# Altium PCB FLYBACK_SWITCHING_POWER_SUPPLY_V1_0.PcbDoc
Units mil, origin at the board's own origin, x right, y up, seen from the top; angles counter-clockwise.
Board outline 2825 x 1550 mil, 2 copper layers (Top Layer, Bottom Layer); 32 components, 21 nets, 77 pads, 0 vias.
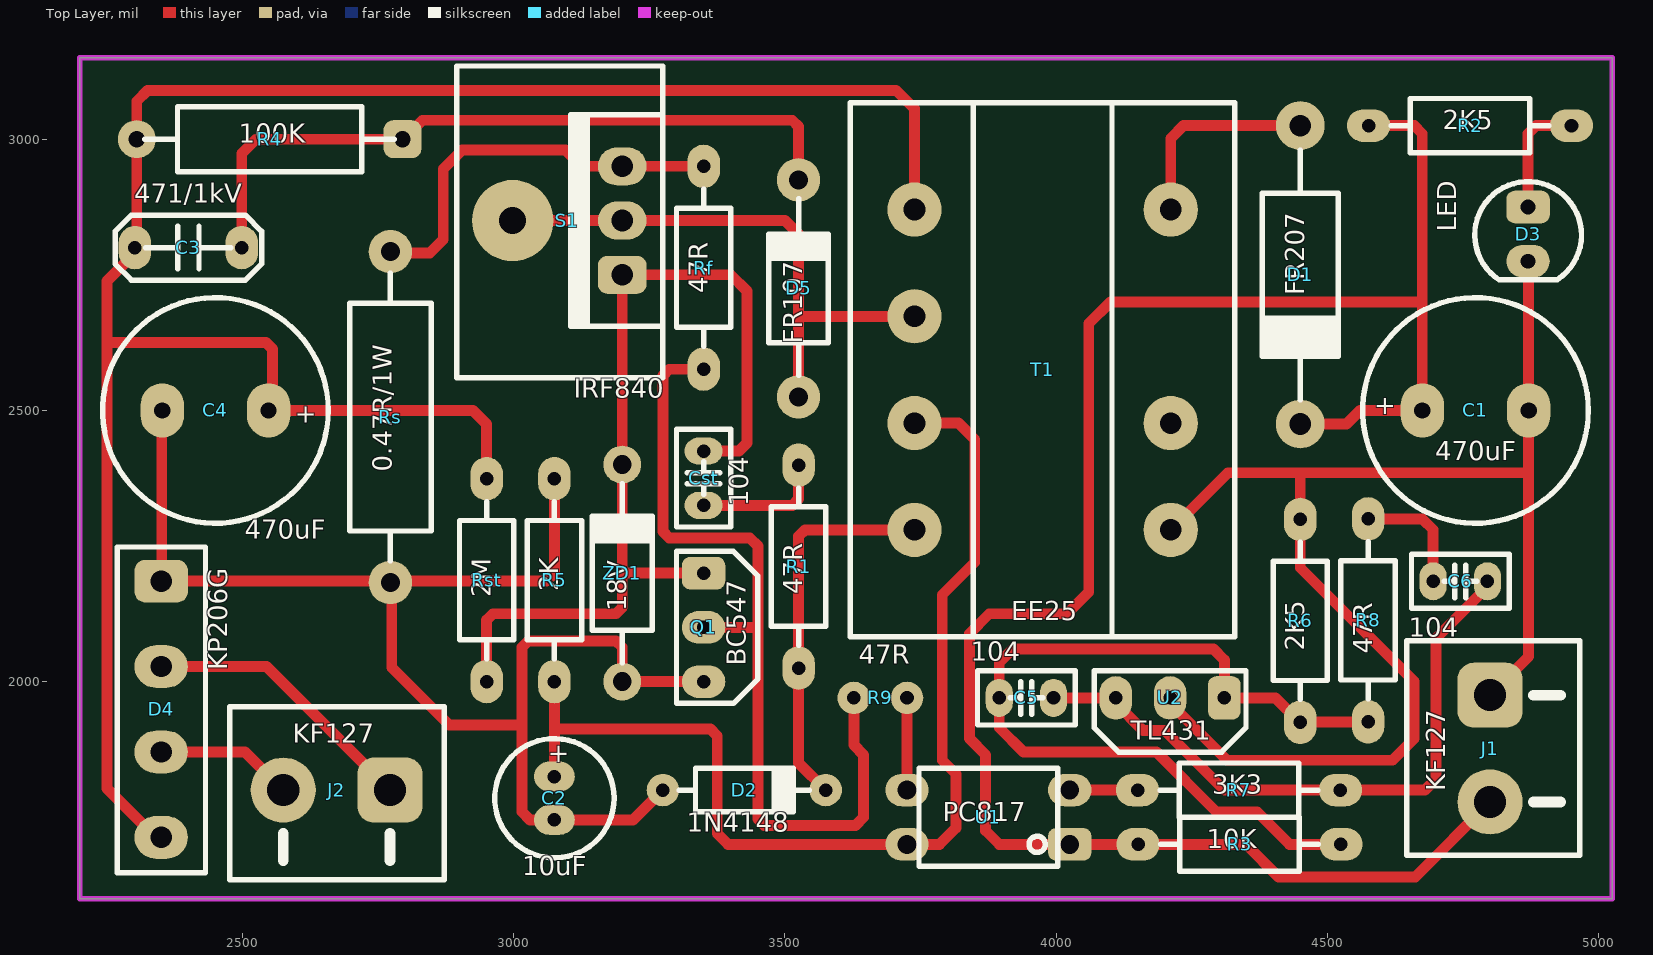
[diagram p0: Top Layer view]
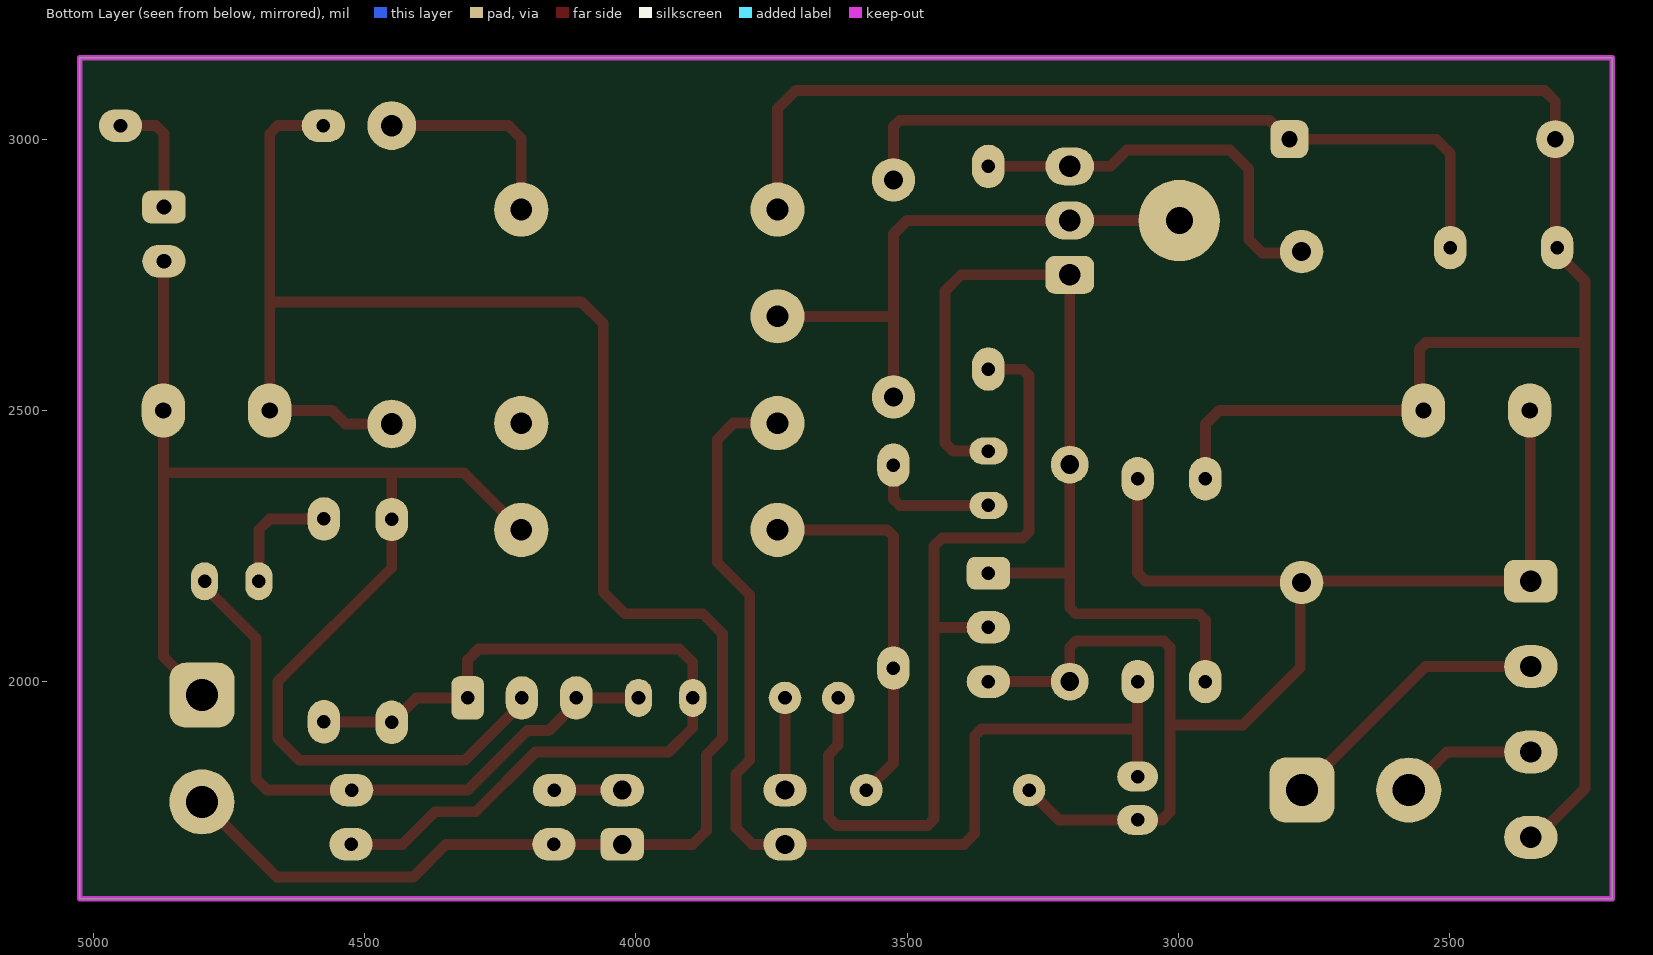
[diagram p1: Bottom Layer view, seen from below]
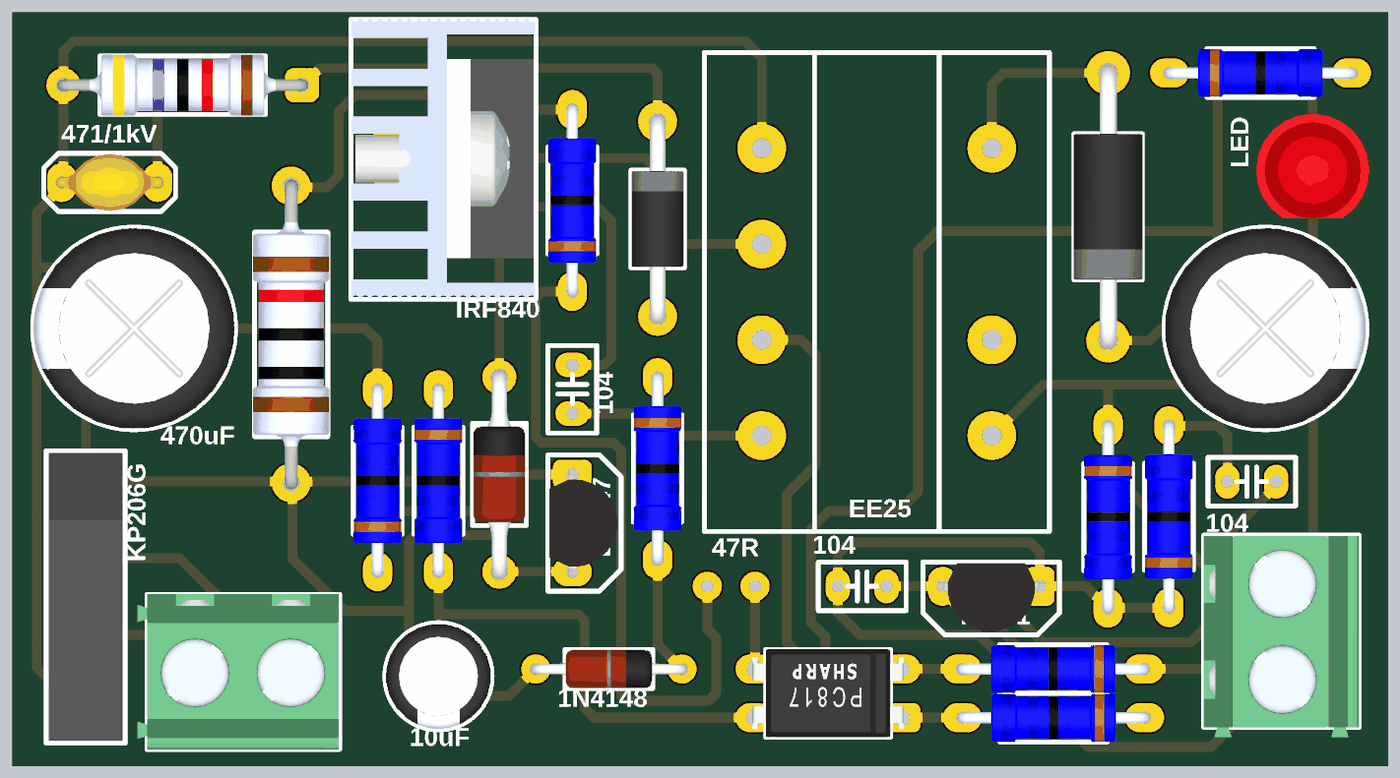
[diagram p2: 3D render of the assembled board from above, using the file's embedded part models]

## Layer stack, top to bottom
Top Solder: solder mask 0.4, Solder Resist, Dk 3.5
Top Layer: signal copper 1.4
Dielectric 1: dielectric 12.6, FR-4, Dk 4.8
Bottom Layer: signal copper 1.4
Bottom Solder: solder mask 0.4, Solder Resist, Dk 3.5

## Board outline
2200,1600 5025,1600 5025,3150 2200,3150

## Design rules (kind name [scope] priority, off if disabled: settings)
Clearance [All] p1: gap=10 ignorepadtopadclearanceinfootprint=FALSE except(0: Arc-Hole Track-Hole SMDPad-Hole THPad-Hole Via-Hole Fill-Hole Poly-Hole Region-Hole Text-Hole)
PolygonConnect [All] p1: connectstyle=Relief reliefconductorwidth=10 reliefentries=4 polygonreliefangle="90 Angle" airgapwidth=10
RoutingVias [All] p1: holewidth=28 width=50 viastyle="Through Hole" minholewidth=28 minwidth=50 maxholewidth=28 maxwidth=50
SolderMaskExpansion [All] p1: expansion=4 istentingtop=FALSE
Width [All] p1: maxlimit=50 minlimit=10 preferedwidth=20
30 further rules are at their usual default settings.

## Components (designator, comment, footprint, x,y, rotation, side; value= is the part's Value field where it differs from the comment)
C1 "470uF" CAP_RAD_D10x12.5 4773,2500 r0 top
C2 "10uF" CAP_RAD_D05x11 3075,1785 r270 top
C3 "471/1kV" CAP_Ceramic_5MM 2400,2800 r180 top
C4 "470uF" CAP_RAD_D10x12.5 2450,2500 r180 top
C5 "104" CAP_Ceramic_2.5MM 3945,1970 r0 top
C6 "104" CAP_Ceramic_2.5MM 4745,2185 r0 top
Cst "104" CAP_Ceramic_2.5MM 3350,2375 r270 top
D1 "FR207" DO-204AC-BK 4450,2750 r270 top
D2 "1N4148" DO-204AH-RD 3425,1800 r0 top
D3 "LED" LED_5MM 4870,2825 r270 top
D4 "KP206G" DIODE_2A 2350,1950 r270 top
D5 "FR107" DO-204AL-BK 3525,2725 r90 top
J1 "KF127" DG127-5.0-02P-14-00AH 4800,1975 r270 top
J2 "KF127" DG127-5.0-02P-14-00AH 2771.85,1800 r180 top
Q1 "BC547" TO-92 3350,2100 r270 top
R1 "47R" RES-0.25W-H 3525,2212 r270 top
R2 "2K5" RES-0.25W-H 4763,3025 r0 top
R3 "10K" RES-0.25W-H 4338,1700 r180 top
R4 "100K" RES-0.5W-H 2550,3000 r180 top
R5 "2K" RES-0.25W-H 3075,2187 r270 top
R6 "2K5" RES-0.25W-H 4450,2112 r270 top
R7 "3K3" RES-0.25W-H 4337,1800 r180 top
R8 "47R" RES-0.25W-H 4575,2113 r90 top
R9 "47R" RES-0.25W-V 3725,1970 r180 top
Rf "47R" RES-0.25W-H 3350,2763 r90 top
Rs "0.47R/1W" RES-1W-H 2772.5,2487.72 r90 top
Rst "2M" RES-0.25W-H 2950,2187 r90 top
S1 "IRF840" TO-220-HEAT-SINK-1 3200,2850 r90 top
T1 "EE25" TRANSFORMER-FLUOLAMP-8W 3975,2575 r270 top
U1 "PC817" PC817-DIP 3875,1750 r180 top
U2 "TL431" TO-92 4210,1970 r180 top
ZD1 "18V" DO-204AL-RD 3200,2200 r90 top

## Footprints (in the part's own frame and the unit in brackets; to place one, negate y for a bottom-side part, rotate by r counter-clockwise, add the part's x,y. Pads: shape width x height; smd on the part's side, far side on the other; paste and mask are expansions set on the pad)
CAP_Ceramic_2.5MM [mil]
  oval 50x70 hole 25: 1(-50,0) 2(50,0)
  silkscreen extent -90,-50 90,50, body extent -92,-49 92,49, height 289
CAP_Ceramic_5MM [mil]
  oval 60x80 hole 25: 1(-98.43,0) 2(98.43,0)
  silkscreen extent -135,-60 135,60, body extent -110,-59 110,59, height 216
CAP_RAD_D05x11 [mil]
  oval 55x75 hole 25: 1(-40,0) 2(40,0)
  silkscreen extent -110,-110 110,110, body extent -108,-108 108,108, height 492
CAP_RAD_D10x12.5 [mil]
  oval 80x100 hole 30: 1(-98,0) 2(98,0)
  silkscreen extent -208,-208 208,208, body extent -207,-207 207,207, height 551
DG127-5.0-02P-14-00AH [mil]
  rrect50% 120x120 hole 59.06: 1(0,0)
  round 120 hole 59.06: 2(196.85,0)
  silkscreen extent -100,-154 295,165, body extent -98,-154 315,165, height 398
DIODE_2A [mm]
  rrect50% 2x2.5 hole 1: 1(-5.975,0)
  oval 2x2.5 hole 1: 2(-1.975,0) 3(2.025,0) 4(6.025,0)
  silkscreen extent -7.57,-2.05 7.68,2.07, body extent -7.47,-1.9 7.53,1.9, height 11
DO-204AC-BK [mil]
  round 90 hole 40: 1(-275,0) 2(275,0)
  silkscreen extent -230,-70 230,70, body extent -293,-71 293,71, height 146
DO-204AH-RD [mil]
  round 60 hole 25: 1(-150,0) 2(150,0)
  silkscreen extent -120,-40 120,40, body extent -161,-39 161,39, height 82
DO-204AL-BK [mil]
  round 80 hole 35: 1(-200,0) 2(200,0)
  silkscreen extent -160,-55 165,55, body extent -216,-53 216,53, height 110
DO-204AL-RD [mil]
  round 70 hole 35: 1(-200,0) 2(200,0)
  silkscreen extent -165,-55 165,55, body extent -216,-53 216,53, height 110
LED_5MM [mil]
  rrect50% 60x80 hole 27.56: 1(-50,0)
  oval 60x80 hole 27.56: 2(50,0)
  silkscreen extent -97,-98 84,98, body extent -116,-116 98,116, height 339
PC817-DIP [mil]
  rrect50% 80x60 hole 35: 1(-150,50)
  oval 80x60 hole 35: 2(-150,-50) 3(150,-50) 4(150,50)
  silkscreen extent -128,-90 128,90, body extent -155,-90 155,90, height 169
RES-0.5W-H [mil]
  rrect50% 70x70 hole 30: 1(-245,0)
  round 70 hole 30: 2(245,0)
  silkscreen extent -230,-60 230,60, body extent -258,-63 258,63, height 143
RES-0.25W-H [mil]
  oval 80x60 hole 25: 1(-187,0) 2(187,0)
  silkscreen extent -145,-50 145,50, body extent -199,-49 199,49, height 109
RES-0.25W-V [mil]
  round 60 hole 25: 1(0,0) 2(98,0)
  body extent -49,-49 110,49, height 334
RES-1W-H [mil]
  round 80 hole 35: 1(-305,0) 2(305,0)
  silkscreen extent -265,-75 265,75, body extent -319,-79 319,79, height 179
TO-92 [mil]
  rrect50% 60x80 hole 25: 1(-100,0)
  oval 60x80 hole 25: 2(0,0) 3(100,0)
  silkscreen extent -140,-50 140,100, body extent -109,-48 109,93, height 298
TO-220-HEAT-SINK-1 [mil]
  rrect50% 70x90 hole 40: 1(-100,0)
  round 150 hole 50: 2(0,202)
  oval 70x90 hole 40: 2(0,0) 3(100,0)
  silkscreen extent -290,-75 285,305, body extent -288,-74 286,304, height 791
TRANSFORMER-FLUOLAMP-8W [mm]
  round 2.54 hole 1.016: 1(-7.5,-6) 2(-2.5,-6) 3(2.5,-6) 4(7.5,-6) 5(7.5,6) 6(2.5,6) 7(-7.5,6)
  silkscreen extent -12.5,-9 12.5,9

## Part data
C1 C2 C4: library part Capacitor(Radian)
C3 C5 C6 Cst: library part Capacitors(Disc)
D1: library part Diode-FR207
D2: library part Diode-1N4148
D3: library part "LED 5MM"
D4: library part Diode_KP206G
D5: library part Diode-FR107, "1A 1000V"
J1 J2: library part DG127-5.0-02P-14-00AH
Q1: library part Transistor-BC547, "VCEO: 45 Vdc / VCBO: 50 Vdc / VEBO: 6.0 Vdc"
R1 R2 R3 R4 R5 R6 R7 R8 R9 Rf Rs Rst: library part "Resistors THD"
S1: library part Mosfet-IRF840
T1: library part TRANS-FLUOLAMP-V0
U1: library part Opto-PC817
U2: library part Ic-TL431
ZD1: library part Diode-Zener

## Nets (pads, with @x,y where several pads share a name; then routed paths per layer and width w, separated by ;. In a path a pad name is that pad's centre, name@x,y a point inside that pad or via, vN(x,y) a via of type N, cw(c..) or ccw(c..) an arc to the next point about the centre after c; other vN are vias at no path point)
GND: C2.2 C4.2 D2.1 D4.1 Q1.3 R5.1 Rs.1 ZD1.1 | length 2666.2
  Top Layer w20: C4.2 2351,2499 2351,2186.22 D4.1 Rs.1@2770,2185.22 ; R5.1 3075,2200 3060.22,2185.22 Rs.1@2770,2185.22 ; D2.1 3220,1745 C2.2 3030,1745 3015,1760 3015,1920 ; Q1.3 ZD1.1 3200,2063.28 3188.28,2075 3026.72,2075 3015,2063.28 3015,1920 ; Rs.1@2770,2185.22 2775,2180.22 2775,2133 2775,2026 2881,1920 3015,1920
NetC1_1: C1.1 D1.2 J1.2 R2.1 R3.2 U1.1 | length 3627.1
  Top Layer w20: D1.2 4535,2475 4560,2500 C1.1 4675,2700 ; R2.1 4660,3025 4675,3010 4675,2700 ; J1.2 4661.85,1640 4410,1640 4350,1700 R3.2 U1.1 3895,1700 3870,1725 3870,1865 3840,1895 3840,2088.28 3876.72,2125 4020,2125 4060,2165 4060,2660 4100,2700 4675,2700
NetC1_2: C1.2 D3.2 J1.1 R6.1 T1.5 U2.2 | length 2629.3
  Top Layer w20: U2.2 4210,1960 4315,1855 4620,1855 4660,1895 4660,2000 4450,2210 R6.1 4450,2385 ; T1.5 4316.5,2385 4450,2385 ; J1.1 4871,2046 C1.2 4870.5,2500.5 4870.5,2774.5 D3.2 ; 4870,2385 4450,2385
NetC2_1: C2.1 R5.2 T1.3 U1.4 | length 1996.3
  Top Layer w20: C2.1 3075,1912.5 ; R5.2 3075,1912.5 ; T1.3 3820,2476.57 3850,2446.57 3850,2220 3790,2160 3790,1855 3815,1830 3815,1730 3785,1700 U1.4 3395,1700 3375,1720 3375,1900 3362.5,1912.5 3075,1912.5
NetC3_1: C3.1 D5.2 R4.1 | length 1328.6
  Top Layer w20: C3.1 2498.43,2973.43 2525,3000 2796.72,3000 2831.72,3035 3513.28,3035 3525,3023.28 D5.2
NetC3_2: C3.2 C4.1 D4.4 R4.2 Rst.2 T1.1 | length 4010.7
  Top Layer w20: D4.4 2340.16,1712.78 2250,1802.94 2250,2620 ; Rst.2 2950,2475 2925,2500 C4.1 2555,2507 2555,2613.28 2543.28,2625 2255,2625 2250,2620 ; T1.1 3738.78,3056.22 3705,3090 2325,3090 2305,3070 2305,2803.42 C3.2 2301.57,2790 2250,2738.42 2250,2620
NetC5_1: C5.1 R3.1 R6.2 R8.1 U2.1 | length 1626.7
  Top Layer w20: R3.1 4430,1700 4370,1760 4295,1760 4185,1870 3940,1870 3895,1915 C5.1 3895,2035 3920,2060 4290,2060 4310,2040 U2.1 4404.18,1970 4449.18,1925 R6.2 4450.5,1925.5 4574.5,1925.5 R8.1
NetC5_2: C5.2 C6.2 R7.1 U2.3 | length 1193.9
  Top Layer w20: C5.2 U2.3 4110,1960 4160,1910 4200,1910 4310,1800 R7.1 4680,1800 4700,1820 4700,2080 4795,2175 C6.2
NetC6_1: C6.1 R8.2 | length 223.3
  Top Layer w20: R8.2 4675,2300 4695,2280 C6.1
NetCst_1: Cst.1 Q1.1 Rst.1 S1.1 ZD1.2 | length 1744.9
  Top Layer w20: Rst.1 2950,2113.28 2961.72,2125 3188.28,2125 3200,2136.72 3200,2200 ; Q1.1 3200,2200 ; Cst.1 3415,2425 3430,2440 3430,2720 3400,2750 S1.1 ZD1.2 3200,2200
NetCst_2: Cst.2 R1.1 | length 242.1
  Top Layer w20: Cst.2 3513.28,2325 3525,2336.72 R1.1
NetD1_1: D1.1 T1.7 | length 379.6
  Top Layer w20: T1.7 4211.22,3001.22 4235,3025 D1.1
NetD2_2: D2.2 R1.2 T1.4 | length 707.4
  Top Layer w20: D2.2 3525,1850 R1.2 3525,2268.01 3536.72,2279.72 T1.4
NetD3_1: D3.1 R2.2 | length 221.2
  Top Layer w20: D3.1 4870,3010 4885,3025 R2.2
NetD4_2: D4.2 J2.1 | length 516.2
  Top Layer w20: D4.2 2544.11,2027.74 J2.1
NetD4_3: D4.3 J2.2 | length 254.1
  Top Layer w20: D4.3 2504.74,1870.26 J2.2
NetD5_1: D5.1 S1.2 T1.2 | length 1051.1
  Top Layer w20: S1.2@2998,2850 3200,2850 3500,2850 3525,2825 3525,2673.43 ; D5.1 3525,2673.43 ; T1.2 3525,2673.43
NetQ1_2: Q1.2 R9.2 Rf.1 | length 1590.3
  Top Layer w20: Q1.2 3450,2100 ; Rf.1 3286.72,2576 3275,2564.28 3275,2276.72 3286.72,2265 3435,2265 3450,2250 3450,2100 ; R9.2 3627,1883 3645,1865 3645,1750 3630,1735 3461.72,1735 3450,1746.72 3450,2100
NetR7_2: R7.2 U1.2 | length 125
  Top Layer w20: U1.2 R7.2
NetR9_1: R9.1 U1.3 | length 170
  Top Layer w20: U1.3 R9.1
NetRf_2: Rf.2 Rs.2 S1.3 | length 745.9
  Top Layer w20: Rs.2 2775.22,2790 2845,2790 2870,2815 2870,2945 2905,2980 3095,2980 3125,2950 S1.3 Rf.2
pads on no net: T1.6

## Keep-outs
Keep-Out Layer:
  the board outline again, w10

## Text inside footprints (layer, text, board x,y; h text height)
C1: Top Overlay "+" at 4586.57,2481.07 h60
C2: Top Overlay "+" at 3056.07,1886.43 h60 r270
C4: Top Overlay "+" at 2636.43,2518.93 h60 r180